# Altium PCB esp32_with_usbc_1st'one.PcbDoc (part 2 of 2)
Units mil, origin at the board's own origin, x right, y up, seen from the top; angles counter-clockwise.
Board outline 2850 x 1000 mil, 4 copper layers (L1, L2, L3, L4), stack 61.583 mil thick; 64 components, 73 nets, 299 pads, 171 vias.
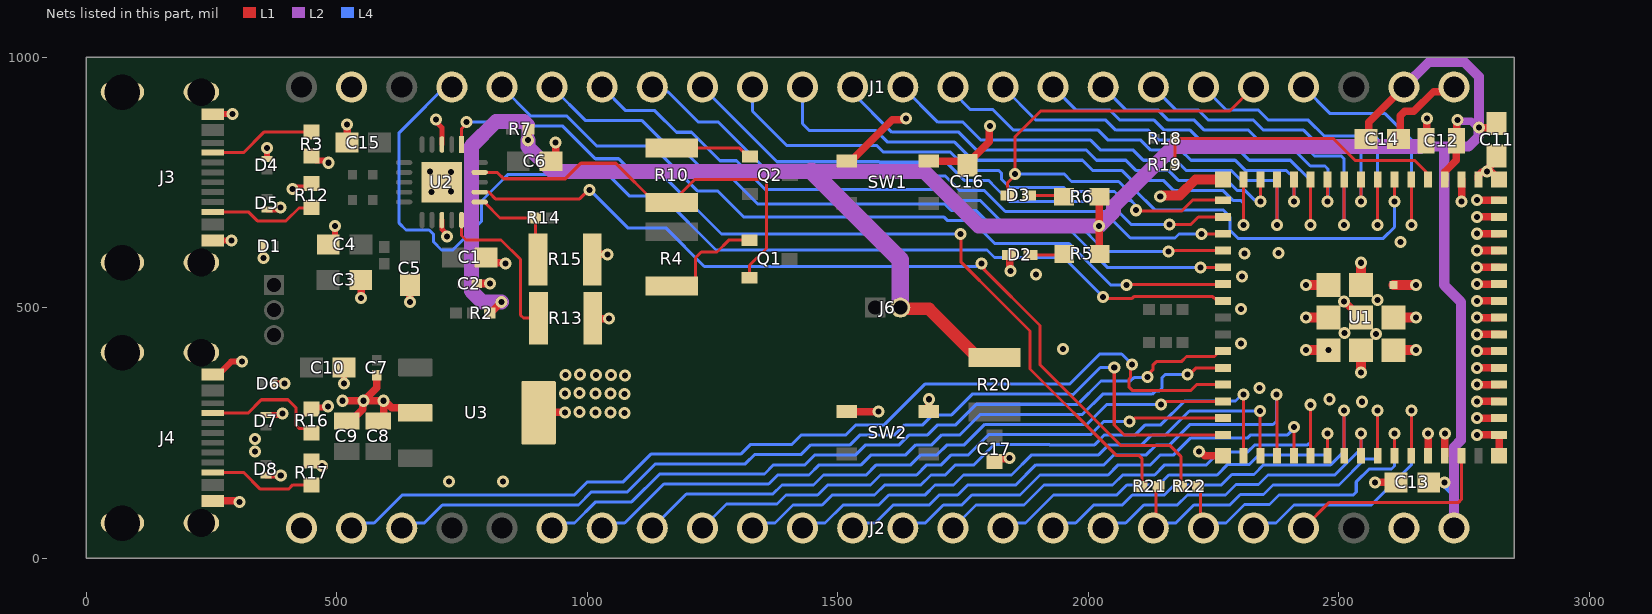
[diagram p4: the nets of this part, all layers, seen from the top]

## Via types
v1: diameter 24, hole 12, L1 to L4, tented both sides, 171 vias

## Nets (pads, with @x,y where several pads share a name; then routed paths per layer and width w, separated by ;. In a path a pad name is that pad's centre, name@x,y a point inside that pad or via, vN(x,y) a via of type N, cw(c..) or ccw(c..) an arc to the next point about the centre after c; other vN are vias at no path point) (continued)
GND: C1.2 C2.2 C3.2 C4.2 C5.2 C6.2 C7.2 C8.1 C9.1 C10.2 C11.2 C12.1 C13.2 C14.2 C15.2 C16.2 C17.2 D1.1 D2.1 D4.1 D5.1 D6.1 D7.1 D8.1 J1.1 J1.23 J2.2 J2.24 J3.1 J3.2 J3.3 J3.4 J3.A1-B12 J3.B1-A12 J4.1 J4.2 J4.3 J4.4 J4.A1-B12 J4.B1-A12 R3.2 R12.2 R13.2 R15.1 R16.2 R17.2 SW1.3 SW1.4 SW2.3 SW2.4 U1.1 U1.2 U1.42 U1.43 U1.46 U1.47 U1.48 U1.49 U1.50 U1.51 U1.52 U1.53 U1.54 U1.55 U1.56 U1.57 U1.58 U1.59 U1.60 U1.61 U1.62 U1.63 U1.64 U1.65 U1.66 U1.67 U1.68 U1.69 U1.70 U1.71 U1.72 U1.73 U2.3 U2.13 U2.21 U3.2 U3.4 | length 3650.2
  L1 w10.01: U2.13@710,674.59 710.23,674.35 710.23,656.13 720.65,645.71 v1(720.65,641.92)
  L1 w10.1: v1(698,875) 698,871.24 710,859.24 U2.3@710,825.41
  L1 w12: J4.A1-B12@252.64,366.06 263.46,366.06 289.4,392 v1(311,392) ; J3.B1-A12@252.64,633.94 289.94,633.94 v1(290,634) ; J3.A1-B12@252.64,885.91 252.68,885.95 v1(292,886) v1(292,886) ; D1.1@353.5,622 353.5,599.5 v1(354,599) ; D8.1@359,164.5 v1(388.5,164.5) ; D5.1@361,695.5 380.25,695.5 384.75,700 v1(388,700) ; D4.1@361,796.5 v1(361,818) ; D7.1@363,285.5 385.25,285.5 388.75,289 v1(392,289) ; D6.1@376,348 v1(396,348) ; v1(412,737) 414.3,739.3 441.89,739.3 R12.2@450,747.4 ; R17.2@450,193.7 458,185.7 468.28,185.7 v1(470.58,183.4) ; R16.2@450,297.4 453.3,300.7 480.7,300.7 v1(483,303) ; R3.2@450,802.6 458.92,793.67 476.08,793.67 480.75,789 v1(484,789) ; C4.2@483.44,626 497,639.56 v1(497,663) ; v1(515,348) C10.2@515,380
  L1 w15: J4.B1-A12@252.64,114.09 303.91,114.09 v1(306,112) ; v1(512,314) v1(554,314) ; C9.1@520,273.45 528.56,273.45 552.28,297.17 552.28,312.28 v1(554,314) ; C15.2@520.44,829 521,829.56 v1(521,865) ; C3.2@548.12,555 549,554.12 v1(549,519) ; C7.2@580,365 580,340 v1(554,314) ; C8.1@583,273.45 584.55,273.45 594,282.91 v1(594,314) ; v1(646,511) C5.2@646,545.44 ; U3.2@656.97,290 646.75,300.22 610.22,300.22 596.44,314 v1(594,314) ; C2.2@779.81,548 v1(806,548) ; C1.2@798.12,600 808.4,589.72 835.28,589.72 v1(837,588) ; U3.4@903.03,290 U3.4@903.03,291 ; C6.2@927.56,792 937,801.44 v1(937,829) ; U3.4@929.98,331 903.03,304.05 U3.4@903.03,291 ; v1(956,291) U3.4@903.03,291 ; R13.2@1008.16,467 1019.16,478 v1(1044,478) ; R15.1@1010.16,596 1020.16,606 v1(1041,606) ; SW2.4@1518.31,292.32 1580.96,292.32 v1(1581.63,293) ; SW1.4@1518.31,792.32 1526.18,792.32 1609.14,875.28 1634.28,875.28 v1(1636,877) ; SW2.3@1681.69,292.32 1682,292.63 v1(1682,317) ; SW1.3@1681.69,792.32 1750.79,792.32 C16.2@1759,784.12 1759,786.99 1802.66,830.65 1802.66,860.66 v1(1804.38,862.38) ; C17.2@1813,192.32 1818.98,198.3 1841.26,198.3 v1(1842.98,200.02) ; D2.1@1841.69,605 1843.35,603.35 1843.35,574.65 v1(1845,573) ; v1(2221,213) 2223.44,213 2232.23,204.2 2268.61,204.2 U1.64@2268.82,204.41 ; v1(2511,512) 2512.41,512 U1.61@2544.41,480 ; v1(2572,151) C13.2@2614.44,151 ; C14.2@2619.56,836 2623.19,839.63 2623.19,882.71 2631.98,891.5 2650.09,891.5 2689.76,931.17 2721.17,931.17 J1.1@2730,940 ; C12.1@2674.55,833 2675.27,833.73 2675.27,876.27 v1(2676,877) ; U1.42@2678.27,204.41 v1(2678.27,248.27) ; U1.43@2711.73,204.41 v1(2711.73,248.27) ; v1(2745.2,711.73) U1.2@2745.2,755.59 ; v1(2776.14,245.75) U1.46@2820,245.75 U1.65@2820,204.41 ; v1(2776.14,279.21) U1.47@2820,279.21 ; v1(2776.14,312.68) U1.48@2820,312.68 ; v1(2776.14,346.14) U1.49@2820,346.14 ; v1(2776.14,379.61) U1.50@2820,379.61 ; v1(2776.14,413.07) U1.51@2820,413.07 ; v1(2776.14,446.54) U1.52@2820,446.54 ; v1(2776.14,480) U1.53@2820,480 ; v1(2776.14,513.46) U1.54@2820,513.46 ; v1(2776.14,546.93) U1.55@2820,546.93 ; v1(2776.14,580.39) U1.56@2820,580.39 ; v1(2776.14,613.86) U1.57@2820,613.86 ; v1(2776.14,647.32) U1.58@2820,647.32 ; v1(2776.14,680.79) U1.59@2820,680.79 ; v1(2776.14,714.25) U1.60@2820,714.25 ; U1.1@2778.66,755.59 2778.66,763.46 2785.47,770.28 2794.28,770.28 v1(2796,772) ; C11.2@2815,797.44 2815,794.57 2797.72,777.29 2797.72,773.72 v1(2796,772) ; U1.62@2820,755.59 2805.31,770.28 2797.72,770.28 v1(2796,772) ; v1(554,314) v1(594,314)
  L1 w20: v1(2143.82,722) 2144.9,722 2146.9,724 2182.74,724 2214.33,755.59 U1.63@2268.82,755.59 ; v1(2435,545) v1(2435,545) U1.71@2479.45,544.96 ; v1@2435.04,415.04 v1(2479.45,415.04) ; v1(2435,480.04) U1.72@2479.45,480 ; v1(2544.37,370.59) U1.70@2544.41,415.04 ; U1.69@2544.41,544.96 v1(2544.45,589.41) ; U1.68@2609.37,415.04 v1(2653.82,415) ; U1.67@2609.37,480 v1(2653.82,479.96) ; U1.66@2609.37,544.96 v1@2653.78,544.96
  other v1: 724,153 832.15,153 337.49,212.51 337.49,237.49 1075,290 1017,291 1047,291 985,292 2546,312 2482,317 1075,327 956,328 1017,328 1047,328 985,329 2342,339 1076,364 957,365 1018,365 1048,365 986,366 2435,415.08 1950,417 2305.16,428.69 2574,447 2512,449 2304.8,496.95 2577,515 2653.82,544.92 2307,562 1896,566 2312,608 2380,609 2623,631 689,731 728,732 728,771 686,772
GPIO0: R18.2 R19.2 U1.4 | length 597.5
  L1 w6.03: R19.2@2173.18,785 R18.2@2173.18,837 2489.51,837 2533.43,793.08 2652.15,793.08 2675.39,769.84 2675.39,758.46 U1.4@2678.27,755.59
GPIO1: J1.4 U1.5 | length 518.7
  L1 w6.03: U1.5@2644.8,755.59 v1(2644.8,665.2) v1@2645,665
  L4 w6.03: J1.4@2430,940 2483,887 2592.61,887 2644.8,834.8 v1(2644.8,665.2)
GPIO2: D3.1 J1.5 U1.6 | length 1571.1
  L1 w6.03: D3.1@1839,724 1839,748.84 1854,763.84 v1(1854,767) 1854,841 1905,892 2282,892 J1.5@2330,940 ; v1(2611.34,711.73) U1.6@2611.34,755.59
  L4 w6.03: v1(1854,767) 1951.61,767 1966.89,751.72 2060.72,751.72 2078.43,734 2093.63,734 2132.63,695 2269.14,695 2283.16,680.98 2283.16,654.01 2298.97,638.2 2589.06,638.2 2611.34,660.48 v1(2611.34,711.73)
GPIO3: J1.6 U1.7 | length 652.5
  L1 w6.03: v1(2577.87,665.2) U1.7@2577.87,755.59
  L4 w6.03: J1.6@2230,940 2276,894 2340,894 2360,874 2439.43,874 2471,842.43 2572.02,842.43 2577.87,836.57 v1(2577.87,665.2)
GPIO4: J1.7 U1.8 | length 614.2
  L1 w6.03: v1(2544.41,711.73) U1.8@2544.41,755.59
  L4 w6.03: J1.7@2130,940 2176,894 2220,894 2240,874 2330,874 2350,854 2430,854 2461.57,822.43 2538.55,822.43 2544.41,816.57 v1(2544.41,711.73)
GPIO5: J1.8 U1.9 | length 762.1
  L1 w6.03: v1(2510.94,665.2) U1.9@2510.94,755.59
  L4 w6.03: J1.8@2030,940 2076,894 2140,894 2160,874 2211.72,874 2231.72,854 2320,854 2340,834 2420,834 2451.57,802.43 2505.09,802.43 2510.94,796.57 v1(2510.94,665.2)
GPIO6: J1.9 U1.10 | length 725.1
  L1 w6.03: v1(2477.48,711.73) U1.10@2477.48,755.59
  L4 w6.03: J1.9@1930,940 1976,894 2043.36,894 2063.36,874 2131.72,874 2151.72,854 2203.43,854 2223.43,834 2310,834 2330,814 2411.72,814 2443.29,782.43 2472.47,782.43 2478.33,776.57 2478.33,712.58 v1(2477.48,711.73)
GPIO7: J1.10 U1.11 | length 869.9
  L1 w6.03: v1(2444.02,665.2) U1.11@2444.02,755.59
  L4 w6.03: J1.10@1830,940 1896,874 2035.07,874 2055.07,854 2120,854 2140,834 2195.15,834 2215.15,814 2301.72,814 2321.72,794 2403.43,794 2444.02,753.42 v1(2444.02,665.2)
GPIO8: J1.11 U1.12 | length 852.2
  L1 w6.03: v1(2410.55,711.73) U1.12@2410.55,755.59
  L4 w6.03: J1.11@1730,940 1730,930 1765,895 1809.95,895 1850.95,854 2020,854 2040,834 2105,834 2125,814 2185,814 2205,794 2293.43,794 2313.43,774 2395,774 2410.55,758.45 v1(2410.55,711.73)
GPIO9: J1.12 U1.13 | length 999.9
  L1 w6.03: v1(2377.09,665.2) U1.13@2377.09,755.59
  L4 w6.03: J1.12@1630,940 1700,870 1750,870 1786,834 2005,834 2025,814 2090,814 2110,794 2175,794 2195,774 2285.15,774 2305.15,754 2371.23,754 2377.09,748.14 v1(2377.09,665.2)
GPIO10: J1.13 U1.14 | length 959.1
  L1 w6.03: v1(2343.62,711.73) U1.14@2343.62,755.59
  L4 w6.03: J1.13@1530,940 1530,928 1608,850 1741.72,850 1777.72,814 1996.72,814 2016.72,794 2075,794 2095,774 2160,774 2180,754 2276.86,754 2296.86,734 2312.58,734 2332.17,714.41 2340.94,714.41 v1(2343.62,711.73)
GPIO11: J1.14 U1.15 | length 1152.3
  L1 w6.03: v1(2310.16,665.2) U1.15@2310.16,755.59
  L4 w6.03: J1.14@1430,940 1430,867 1444,853 1576.72,853 1599.72,830 1733.43,830 1769.43,794 1988.43,794 2008.43,774 2066.72,774 2086.72,754 2150,754 2169,735 2170.72,735 2171.72,734 2268.58,734 2288.58,714 2304.3,714 2310.16,708.14 v1(2310.16,665.2)
GPIO12: J1.15 U1.16 | length 1090.9
  L1 w6.03: v1(2095.22,694.22) 2096.45,693 2187.1,693 2208.35,714.25 U1.16@2268.82,714.25
  L4 w6.03: J1.15@1330,940 1330,892 1399,823 1578.43,823 1591.43,810 1725.15,810 1761.15,774 1821.14,774 1827,768.14 1827,755.82 1842.82,740 1950.33,740 1958.61,731.72 2052.43,731.72 2070.15,714 2085.1,714 2092.55,706.55 2092.55,696.9 v1(2095.22,694.22)
GPIO13: J1.16 U1.17 | length 1158.8
  L1 w6.03: v1(2162,666) 2205.04,666 2219.82,680.79 U1.17@2268.82,680.79
  L4 w6.03: J1.16@1230,940 1379,791 1582.15,791 1583.15,790 1716.86,790 1752.86,754 1801.14,754 1807,748.14 1807,747.53 1842.82,711.72 2039.55,711.72 2085.27,666 v1(2162,666)
GPIO14: J1.17 U1.18 | length 1266.9
  L1 w6.03: v1(2226,647) 2226.16,647.16 2268.66,647.16 U1.18@2268.82,647.32
  L4 w6.03: J1.17@1130,940 1139.95,930.05 1161.95,930.05 1222.14,869.86 1262.14,869.86 1369,763 1714.36,763 1743.36,734 1792.25,734 1834.53,691.72 2031.27,691.72 2083.98,639 2173.18,639 2181.18,647 v1(2226,647)
GPIO15: J1.18 U1.19 | length 1375.5
  L1 w6.03: v1(2160,612) 2161.86,613.86 U1.19@2268.82,613.86
  L4 w6.03: J1.18@1030,940 1077,893 1135,893 1178.14,849.86 1208.14,849.86 1265,793 1298,793 1355,736 1713.07,736 1735.07,714 1783.96,714 1826.25,671.72 1974.9,671.72 2034.61,612 v1(2160,612)
GPIO16: J1.19 U1.20 | length 1490
  L1 w6.03: v1@2223,582 v1(2224.61,580.39) U1.20@2268.82,580.39
  L4 w6.03: J1.19@930,940 997,873 1109.72,873 1152.86,829.86 1176.14,829.86 1240,766 1281,766 1340,707 1713.79,707 1726.79,694 1775.68,694 1817.96,651.72 1966.61,651.72 2037.94,580.39 v1(2224.61,580.39)
GPIO17: J1.20 U1.21 | length 1603.2
  L1 w6.03: v1(2076,545) 2076.96,545.96 2267.85,545.96 U1.21@2268.82,546.93
  L4 w6.03: J1.20@830,940 888,882 959.72,882 1019.72,822 1131,822 1220,733 1260,733 1312,681 1711.51,681 1718.51,674 1767.4,674 1806.4,635 1806.47,635 1813.47,628 1962.05,628 2045.05,545 v1(2076,545)
GPIO18: J1.21 U1.22 | length 2192.8
  L1 w6.03: v1(2030,521) 2032.68,518.32 2038.14,518.32 2038.86,517.61 2086.79,517.61 2091.01,521.83 2248.39,521.83 2253.87,516.34 2265.94,516.34 U1.22@2268.82,513.46
  L4 w6.03: J1.21@730,940 716,940 640,864 624.86,848.86 624.86,668.47 638.33,655 684.65,655 693.65,646 693.65,630.74 709.47,614.92 731.84,614.92 788.99,672.08 788.99,712.71 821,744.72 842.28,766 1041,766 1084,723 1149,723 1257,615 1798.18,615 1813.18,600 1951,600 v1(2030,521)
GPIO21: J2.19 U1.25 | length 1494
  L1 w6.03: v1(2118,361) 2118,364.79 2128.93,375.72 2128.93,384.93 2136,392 2185.82,392 2196.3,402.48 2252.21,402.48 2258.07,408.34 2258.07,410.2 2260.94,413.07 U1.25@2268.82,413.07
  L4 w6.03: J2.19@930,60 939.95,69.95 974.9,69.95 1017.13,112.19 1088.85,112.19 1144.66,168 1354.15,168 1372.15,186 1434.72,186 1454.72,206 1536,206 1556,226 1623,226 1643,246 1679.72,246 1699.72,266 1735.72,266 1776.73,307.02 1955.03,307.02 1955.26,306.78 1979,306.78 2025.43,353.21 2084.21,353.21 2091,360 2117,360 v1(2118,361)
GPIO26: J2.18 U1.26 | length 1383.5
  L1 w6.03: v1(2198,366) 2201.79,366 2215.39,379.61 U1.26@2268.82,379.61
  L4 w6.03: J2.18@1030,60 1039.95,69.95 1074.9,69.95 1152.95,148 1362.43,148 1380.43,166 1443,166 1463,186 1547,186 1567,206 1636,206 1656,226 1688,226 1708,246 1744,246 1785.02,287.02 1946.74,287.02 1946.98,286.78 1988.65,286.78 2028.86,327 2127.6,327 2133.82,333.21 2141,333.21 2147.32,339.53 2147.32,360.14 2153.18,366 v1(2198,366)
GPIO33: J2.17 U1.28 | length 1243.7
  L1 w6.03: v1(2145,306.21) 2148.79,306.21 2155.25,312.68 U1.28@2268.82,312.68
  L4 w6.03: J2.17@1130,60 1198,128 1370.72,128 1388.72,146 1451.72,146 1471.72,166 1557.15,166 1577.15,186 1646,186 1666,206 1698.43,206 1718.43,226 1752.72,226 1793.73,267.02 1938.46,267.02 1938.69,266.78 1996.93,266.78 2036.36,306.21 v1(2145,306.21)
GPIO34: J2.16 U1.29 | length 1129.8
  L1 w6.03: v1(2082.82,273) 2086.6,273 2092.82,279.21 U1.29@2268.82,279.21
  L4 w6.03: J2.16@1230,60 1278,108 1379,108 1397,126 1460,126 1480,146 1565.43,146 1585.43,166 1657.81,166 1677.81,186 1706.72,186 1726.72,206 1761,206 1802.02,247.02 1930.17,247.02 1930.41,246.78 2005.22,246.78 2031.43,273 v1(2082.82,273)
GPIO35: J2.15 U1.31 | length 1212.6
  L1 w6.03: v1(2310,326) 2310.08,325.92 2310.08,204.49 U1.31@2310.16,204.41
  L4 w6.03: J2.15@1330,60 1339.95,69.95 1374.9,69.95 1410.95,106 1469,106 1489,126 1573.72,126 1593.72,146 1666.09,146 1686.09,166 1715,166 1735,186 1772,186 1813.02,227.02 1921.89,227.02 1922.77,226.14 2012.86,226.14 2032.72,246 2094,246 2114,266 2145,266 2192.58,313.58 2293.79,313.58 2306.21,326 v1(2310,326)
GPIO36: J2.14 U1.32 | length 1099.5
  L1 w6.03: v1(2343,293.58) 2343,205.03 U1.32@2343.62,204.41
  L4 w6.03: J2.14@1430,60 1439.95,69.95 1474.9,69.95 1510.95,106 1582,106 1602,126 1657.34,126 1657.67,125.67 1674.05,125.67 1694.38,146 1731.15,146 1751.15,166 1847.15,166 1887.15,206 2021,206 2041,226 2107,226 2127,246 2154.25,246 2201.83,293.58 v1(2343,293.58)
GPIO37: J2.13 U1.33 | length 1109.6
  L1 w6.03: v1(2376,326) 2376.54,325.46 2376.54,204.95 U1.33@2377.09,204.41
  L4 w6.03: J2.13@1530,60 1539.95,69.95 1574.9,69.95 1610.95,106 1649.05,106 1649.38,105.67 1682.33,105.67 1702.66,126 1739.43,126 1759.43,146 1855.43,146 1895.43,186 2031.72,186 2051.72,206 2116.15,206 2136.15,226 2162.53,226 2203.53,267 2315.5,267 2315.92,266.58 2369.14,266.58 2376,273.44 v1(2376,326)
GPIO38: J2.12 U1.34 | length 924.3
  L1 w6.03: U1.34@2410.55,204.41 2410.78,204.63 2410.78,261.78 v1(2411,262)
  L4 w6.03: J2.12@1630,60 1639.95,69.95 1674.9,69.95 1710.95,106 1747.72,106 1767.72,126 1863.72,126 1903.72,166 2040,166 2060,186 2124.43,186 2144.43,206 2170.82,206 2204.82,240 2318.43,240 2324.43,246 2398.14,246 2411,258.86 v1(2411,262)
GPIO39: J2.11 U1.35 | length 960.9
  L1 w6.03: U1.35@2444.02,204.41 v1(2444,306)
  L4 w6.03: J2.11@1730,60 1776,106 1872,106 1912,146 2048.72,146 2068.72,166 2132.72,166 2152.72,186 2236,186 2262,212 2318.72,212 2332.72,226 2438.14,226 2444,231.86 v1(2444,306)
GPIO40: J2.10 U1.36 | length 790.6
  L1 w6.03: U1.36@2477.48,204.41 v1(2477.48,248.27)
  L4 w6.03: J2.10@1830,60 1839.95,69.95 1874.9,69.95 1930.95,126 2057,126 2077,146 2141,146 2161,166 2257.43,166 2278.43,187 2322,187 2341,206 2471.62,206 2477.48,211.86 v1(2477.48,248.27)
GPIO41: J2.9 U1.37 | length 816.5
  L1 w6.03: U1.37@2510.94,204.41 v1(2510.94,294.8)
  L4 w6.03: J2.9@1930,60 1939.95,69.95 1974.9,69.95 2010.95,106 2068,106 2088,126 2152,126 2172,146 2265.72,146 2286.72,167 2331,167 2350,186 2483.96,186 2510.94,212.98 v1(2510.94,294.8)
GPIO42: J2.8 U1.38 | length 653.9
  L1 w6.03: U1.38@2544.41,204.41 v1(2544.41,248.27)
  L4 w6.03: J2.8@2030,60 2039.95,69.95 2074.9,69.95 2110.95,106 2178,106 2198,126 2274,126 2294,146 2294.38,146 2295.38,147 2340,147 2359,166 2492.25,166 2544.41,218.16 v1(2544.41,248.27)
GPIO45: J2.5 U1.41 | length 566.4
  L1 w6.03: U1.41@2644.8,204.41 v1(2644.8,294.8)
  L4 w6.03: J2.5@2330,60 2339.95,69.95 2374.9,69.95 2410.95,106 2565.18,106 2644.8,185.62 v1(2644.8,294.8)
GPIO46: J2.4 U1.44 | length 426.1
  L1 w6.03: J2.4@2430,60 2481.33,111.33 2739.34,111.33 2745.2,117.18 U1.44@2745.2,204.41
GPIO47: J2.23 U1.27 | length 1953.1
  L1 w6.03: v1(2087.26,386.74) 2084.58,384.06 2084.58,360.27 2081.07,356.76 2081.07,341.79 2088.86,334 2204.18,334 2216.33,346.14 U1.27@2268.82,346.14
  L4 w6.03: J2.23@530,60 539.95,69.95 574.9,69.95 630.95,126 974.38,126 1000.57,152.19 1072.28,152.19 1128.09,208 1307.53,208 1326.53,227 1409,227 1428,246 1516.72,246 1536.72,266 1592.82,266 1673.83,347.02 1962.67,347.02 2022.86,407.21 2066.79,407.21 v1(2087.26,386.74)
GPIO48: J2.22 U1.30 | length 1894.5
  L1 w6.03: v1(2052,380.21) 2052,265.63 2071.88,245.75 U1.30@2268.82,245.75
  L4 w6.03: J2.22@630,60 639.95,69.95 674.9,69.95 710.95,106 982.66,106 1008.85,132.19 1080.57,132.19 1136.38,188 1315.82,188 1334.82,207 1427.43,207 1446.43,226 1525,226 1545,246 1614,246 1634,266 1670,266 1690,286 1727.43,286 1768.45,327.02 1963.31,327.02 1963.54,326.78 1970.72,326.78 2024.14,380.21 v1(2052,380.21)
NetD2_2: D2.2 R5.1 | length 68
  L1 w6.03: D2.2@1885,605 1950.13,605 R5.1@1952.13,607
NetD3_2: D3.2 R6.1 | length 70.5
  L1 w6.03: D3.2@1882.31,724 1948.57,724 R6.1@1951.57,721
NetJ3_A5: J3.A5 R3.1 | length 214.3
  L1 w6.03: J3.A5@252.64,809.13 313.95,809.13 354.82,850 R3.1@450,850
NetJ3_B5: J3.B5 R12.1 | length 216
  L1 w6.03: J3.B5@252.64,691.02 310,691.02 323.69,691.02 341.72,673 399.18,673 424.87,698.69 448.69,698.69 R12.1@450,700
NetJ4_A5: J4.A5 R16.1 | length 256.5
  L1 w6.03: J4.A5@252.64,289.29 322.92,289.29 349.63,316 403.18,316 419,300.18 419,264.86 424.86,259 441,259 R16.1@450,250
NetJ4_B5: J4.B5 R17.1 | length 215
  L1 w6.03: J4.B5@252.64,171.18 314.11,171.18 347.79,137.5 403.76,137.5 412.56,146.3 R17.1@450,146.3
NetQ1_1: Q1.1 R4.1 | length 218.1
  L1 w6.03: R4.1@1169,542.84 1202.49,542.84 1216.29,556.64 1216.29,599.29 1228,611 1259.04,611 1282.44,634.4 Q1.1@1324.24,634.4
NetQ2_1: Q2.1 R10.1 | length 163.2
  L1 w6.03: R10.1@1169,818.16 1304.54,818.16 1321.3,801.4 Q2.1@1325.24,801.4
NetR13_1: R13.1 U2.15 | length 317.7
  L1 w6.03: U2.15@749.37,674.59 749.37,643.86 758.3,634.92 828.26,634.92 867,596.18 867,484.86 872.86,479 R13.1@902.84,479
RTS_FTDI: Q1.2 R10.2 U2.19 | length 849.1
  L1 w6.03: U2.19@785.41,769.68 820.82,769.68 833.43,757.08 956.57,757.08 987.49,788 1057.35,788 1135.51,709.84 R10.2@1169,709.84 1215.16,756 1352.14,756 1358,750.14 1358,618 1324.24,584.24 Q1.2@1324.24,559.6
RXD_FTDI: R21.2 U2.1 | length 1807.5
  L1 w6.03: U2.1@749.37,825.41 749.37,856.94 759,866.57 v1(759,870) ; v1(1745,647) 1745.68,646.32 1745.68,591.14 1822.82,514 1883.7,453.12 1883.7,377.37 2056.06,205 2101.14,205 2107,199.14 2107,143.46 R21.2@2106.54,143
  L4 w6.03: v1(759,870) 853.11,870 861.11,862 951.43,862 1016.43,797 1063,797 1096,764 1151,764 1268,647 v1(1745,647)
TXD_FTDI: R22.2 U2.17 | length 1748.1
  L1 w6.03: U2.17@785.41,730.32 803.62,730.32 806,727.94 816.86,717.08 985.11,717.08 1003.04,735 v1(1005,735) ; v1(1787,588) 1787,584.21 1792.57,578.64 1792.57,575.39 1903.7,464.26 1903.7,385.65 2064.35,225 2163,225 2185,203 2185,143.27 R22.2@2185.27,143
  L4 w6.03: v1(1005,735) 1081,659 1157,659 1234,582 1777.21,582 1783.21,588 v1(1787,588)
U0RXD: J2.6 R22.1 U1.40 | length 640.5
  L1 w6.03: R22.1@2218.73,143 2224.37,137.37 2224.37,65.63 J2.6@2230,60 ; U1.40@2611.34,204.41 v1(2611.34,248.27)
  L4 w6.03: J2.6@2230,60 2239.95,69.95 2274.9,69.95 2311.95,107 2362,107 2381,126 2529.14,126 2535,131.86 2535,152.18 2560.82,178 2605.48,178 2611.34,183.86 v1(2611.34,248.27)
U0TXD: J2.7 R21.1 U1.39 | length 775.9
  L1 w6.03: J2.7@2130,60 2135,65 2135,138 R21.1@2140,143 ; U1.39@2577.87,204.41 v1(2577.87,294.8)
  L4 w6.03: J2.7@2130,60 2139.95,69.95 2174.9,69.95 2210.95,106 2282.66,106 2303.66,127 2350,127 2369,146 2500.53,146 2552.53,198 2572.02,198 2577.87,203.86 v1(2577.87,294.8)
VBUS_SENSE: R14.1 R15.2 U2.16 | length 209.7
  L1 w6.03: U2.16@785.41,710.63 796.72,710.63 796.94,710.4 796.94,708.06 826.14,678.86 R14.1@895.57,678.86 ; R14.1@896.55,678.86 896.55,601.29 R15.2@901.84,596
VCC_3V3: C11.1 C12.2 C13.1 C14.1 J1.2 J2.1 J6.2 R2.1 R5.2 R6.2 R7.1 R20.2 U1.3 | length 4900.8
  L1 w15: R2.1@805.46,489 806.45,489 828.45,511 v1(829,511) ; v1(881.63,833.92) 882.31,834.61 882.31,855.31 R7.1@883,856 ; v1(2021.9,662.9) 2022.17,663.17 2022.17,720.73 R6.2@2022.43,721 ; R5.2@2023,607 2022.45,607.55 2022.45,661.85 v1@2023.5,662.9 ; C14.1@2554.44,836 2559.64,841.2 2559.64,869.64 J1.2@2630,940 ; C13.1@2679.56,151 v1(2711,151) ; U1.3@2711.73,755.59 2712.11,755.96 2712.11,771.11 2734.77,793.77 2734.77,832.32 C12.2@2735.45,833 2735.45,872.45 v1(2737,874) ; J2.1@2730,60 J2.1@2730,72.72 ; v1(2780,859) 2811.44,859 C11.1@2815,862.56
  L1 w25: J6.2@1625,500 1627.83,497.17 1682.5,497.17 1779.51,400.16 R20.2@1813,400.16
  L2 w15: v1(2737,874) 2738.72,872.28 2764.29,872.28 2777.56,859 v1(2780,859)
  L2 w20: J1.2@2630,940 2680,990 2750.71,990 2780,960.71 v1(2780,859) 2779.23,858.23 2779.23,840.95 2759.28,821 2710.64,821 ; 2662,821 2710.64,821 ; J2.1@2730,60 2730,221.28 2743.73,235.01 2743.73,511.46 2710.64,544.55 2710.64,821
  L2 w25: 881,864 881.63,863.37 v1(881.63,833.92)
  L2 w30: v1(829,511) 790.67,511 769,532.67 769,822.33 817.67,871 874,871 881,864 ; v1(881.63,833.92) 881.63,821.12 930.74,772 1448,772 1672.33,772 1781.43,662.9 v1(2021.9,662.9) 2050.9,691.9 2050.9,702.22 2169.67,821 2662,821
  L2 w35: 1448,772 1625,595 J6.2@1625,500
  L4 w15: v1(2711,151) 2711,148.56 2730,129.56 J2.1@2730,60
pads on no net: J1.24 J3.A8 J3.B8 J4.A8 J4.B8 U2.2 U2.4 U2.5 U2.6 U2.7 U2.14

## Polygon pours and split planes (outlines as drawn)
VCC_3V3 on L1 "VCC_3V3_L01_P000" (solid, pour order 0): 2711,865 2711,794 2759,794 2801,836 2843,836 2843,890 2842,891 2840,889 2712,889
+3V3_FTDI on L1 "+3V3_FTDI_L01_P001" (solid, pour order 1): 796.02,872.33 865.67,872.33 866,872 864,870 864,822 884,822 894,812 894,769.5 840.5,769.5 828,782 821,786 818,857 818,868
+3V3_FTDI on L1 "+3V3_FTDI_L01_P002" (solid, pour order 2): 615,572 614,573 614,604 582,604 575,611 577,613 577,639 626,639 662,675 661,676 661,691 629,691 620,680 568,680 548,660 524,660 519,655 519,599 543,599 570,572 614,572
+5V on L1 "+5V_L01_P005" (solid, pour order 5): 355,474 356,473 450,473 501,422 557,422 557,395 571.81,380.19 609,380.19 609,367 620,356 709,356 709,413 635,416 559,475 519,515 353,515 346,508 346,478 350,474 357,473
+5V_VBUS1 on L1 "+5V_VBUS1_L01_P006" (solid, pour order 6): 350,524 351,525 351,578 360,578 370,588 370,635 444,635 448,631 448,576 507,576 508.5,574.5 512,567 514.23,524
+5V_VBUS2 on L1 "+5V_VBUS2_L01_P007" (solid, pour order 7): 337,333 363,333 365,335 365,365 414,365 427,352 478,352 480,354 480,408 448,408 390,466 345,466 345,426 337,418 337,332
GND on L1 "GND_L01_P010" (solid, pour order 10): 1163,383 733,383 729,379 729,343 713,343 693,343 637.4,343 464,343 454.22,296.78 497,254 739,254 739,183 743,179 868,179 937,110 1164,110 1164,380 1163,381
GND on L1 "GND_L01_P008" (solid, pour order 8): 2417,355 2691,355 2691,411 2691,607 2417,607
+3V3_REG on L1 "+3V3_REG_L01_P003" (solid, pour order 3): 496.11,243.45 495.45,243.45 490,237 496.11,149 694,149 696.5,151.5 699,158 699,234 689,244 497,244
VCC_3V3 on L2 "VCC_3V3_L02_P011" (solid, pour order 11): 2693,18 2694,17 2768,17 2785,34 2785,985 800,985 775,960 775,837 868,744 1399,744 1606,542 1604,468 1614,458 1652,458 1652,459 1719,526 1719,685 1736,685 1780,641 2046,641 2205,800 2672,800 2672,545 2728,489 2728,232 2671,175 2671,62
GND on L2 "GND_L02_P013" (solid, pour order 13): 19,29 26,22 2834,22 2834,974 2836,976 17,976
+3V3_REG on L2 "+3V3_REG_L02_P012" (solid, pour order 12): 493,231 683,231 683,132 679,128 493,128
GND on L3 (split plane): 2829.9,20.1 20.1,20.1 20.1,979.9 2829.9,979.9

## Silkscreen, mask and mechanical layers (free items; w line width, h text height)
Top Overlay:
  lines w6: 825,855 825,885 ; 835,115 835,145 ; 1330,115 1330,145 ; 1330,855 1330,885 ; 1830,115 1830,145 ; 1830,855 1830,885 ; 2330,115 2330,145 ; 2330,855 2330,885
  text "J1" at 2396,821 h40
  text "USR LED" at 1841,771 h40
  text "BOOT" at 1531,626 h40
  text "UART" at 16,521 h40
  text "PWR LED" at 1841,516 h40
  text "USB1" at 171,506 h40
  text "REG" at 1401,466 h40
  text "3V3" at 1691,466 h40
  text "+5V" at 436,461 h40
  text "ESP" at 36,456 h40
  text "USB2" at 166,441 h40
  text "RESET" at 1521,346 h40
  text "J2" at 2396,136 h40
Bottom Overlay:
  text "NC" at 401,746 h40 r270
  text "GND" at 496,746 h40 r270
  text "5V" at 591,746 h40 r270
  text "IO9" at 1616,746 h40 r270
  text "IO8" at 1711,746 h40 r270
  text "IO7" at 1801,746 h40 r270
  text "IO6" at 1911,746 h40 r270
  text "IO5" at 2006,746 h40 r270
  text "IO4" at 2111,746 h40 r270
  text "IO3" at 2211,746 h40 r270
  text "IO2" at 2306,746 h40 r270
  text "IO1" at 2411,746 h40 r270
  text "IO18" at 691,741 h40 r270
  text "IO17" at 806,741 h40 r270
  text "IO16" at 911,741 h40 r270
  text "IO15" at 1016,741 h40 r270
  text "IO14" at 1111,741 h40 r270
  text "IO13" at 1216,741 h40 r270
  text "IO12" at 1311,741 h40 r270
  text "IO11" at 1411,741 h40 r270
  text "IO10" at 1511,741 h40 r270
  text "IO0" at 2511,741 h40 r270
  text "3V3" at 2598,738 h40 r270
  text "GND" at 2710,737 h40 r270
  text "<C>2026 HARO" at 1915,560 h60
  text "1ST'ONE V1I1" at 1890,385 h60
  text "<---PIN1--->" at 2711,261 h40 r270
  text "IO46" at 416,126 h40 r270
  text "IO47" at 516,126 h40 r270
  text "IO48" at 611,126 h40 r270
  text "USB-" at 711,126 h40 r270
  text "USB+" at 811,126 h40 r270
  text "IO21" at 911,126 h40 r270
  text "IO26" at 1011,126 h40 r270
  text "IO33" at 1111,126 h40 r270
  text "IO34" at 1211,126 h40 r270
  text "IO35" at 1311,126 h40 r270
  text "IO36" at 1416,126 h40 r270
  text "IO37" at 1516,126 h40 r270
  text "IO38" at 1616,126 h40 r270
  text "IO39" at 1716,126 h40 r270
  text "IO40" at 1816,126 h40 r270
  text "IO41" at 1916,126 h40 r270
  text "IO42" at 2016,126 h40 r270
  text "TXD" at 2116,126 h40 r270
  text "RXD" at 2216,126 h40 r270
  text "IO45" at 2316,126 h40 r270
  text "IO46" at 2416,126 h40 r270
  text "EN" at 2516,126 h40 r270
  text "GND" at 2616,126 h40 r270
  text "3V3" at 2716,126 h40 r270
Top Solder:
  drawing of 6 lines, arcs and shapes, not listed
Board Shape:
  the board outline again, w20

## Text inside footprints (layer, text, board x,y; h text height)
J1: Top 3D Body "RefDes2" at 1492.5,915 h50
J2: Top 3D Body "RefDes2" at 1492.5,35 h50